# EAGLE board bord_projektpraktikum_v2 (EAGLE 7.7.0)

Size 100 x 80 mm. Coordinates in mm from the lower left corner, seen from the top.
Outline: 0,0 100,0 100,80 0,80 0,0
Copper layers (1*16): Top 0.035mm / dielectric 1.5mm / Bottom 0.035mm
Design rules "default": minimum track width 10mil, minimum drill 24mil, track to track 8mil, track to pad 8mil, pad to pad 8mil, via to via 8mil, smd to smd 8mil, copper to edge 40mil, drill to drill 8mil, minimum pad ring 10mil, minimum via ring 8mil, stop-mask expansion 4mil, vias tented up to drill 0mil, thermal gap 10mil

## Footprints (pad centres in the part's own frame; a part is rotated, then mirrored left to right if it is on the bottom)
TO220H = drill 1.118 long: 1 -2.54,-10.16; 2 0,-10.16; 3 2.54,-10.16 | hole 3.302: 0,4.826
SOT54E = drill 0.813 octagon: D -1.27,0; G 0,1.905; S 1.27,0
E2,5-6E = drill 0.813 pad 1.575: + -1.27,0 | drill 0.813 pad 1.575 octagon: - 1.27,0
C025-025X050 = drill 0.813 octagon: 1 -1.27,0; 2 1.27,0
LED5MM = drill 0.813 octagon: A -1.27,0; K 1.27,0
1X18 = drill 1.016 pad 1.88: 1 0,0; 2 2.54,0; 3 5.08,0; 4 7.62,0; 5 10.16,0; 6 12.7,0; 7 15.24,0; 8 17.78,0; 9 20.32,0; 10 22.86,0; 11 25.4,0; 12 27.94,0; 13 30.48,0; 14 33.02,0; 15 35.56,0; 16 38.1,0; 17 40.64,0; 18 43.18,0
DIL16 = drill 0.813 long: 1 -8.89,-3.81; 2 -6.35,-3.81; 3 -3.81,-3.81; 4 -1.27,-3.81; 5 1.27,-3.81; 6 3.81,-3.81; 7 6.35,-3.81; 8 8.89,-3.81; 9 8.89,3.81; 10 6.35,3.81; 11 3.81,3.81; 12 1.27,3.81; 13 -1.27,3.81; 14 -3.81,3.81; 15 -6.35,3.81; 16 -8.89,3.81
1X16 = drill 1.016 pad 1.88: 1 0,0; 2 2.54,0; 3 5.08,0; 4 7.62,0; 5 10.16,0; 6 12.7,0; 7 15.24,0; 8 17.78,0; 9 20.32,0; 10 22.86,0; 11 25.4,0; 12 27.94,0; 13 30.48,0; 14 33.02,0; 15 35.56,0; 16 38.1,0
DCJ0303 = drill 1 pad 2 long: 1 0,3.1; 2 4.8,0; 3 0,-3
0204/5 = drill 0.813 octagon: 1 -2.54,0; 2 2.54,0
RTRIM4G/J = smd 1.3 x 1.3: 1 -1.15,-2.75; 3 1.15,-2.75 | smd 2 x 1.3: 2 0,2.75
PN87520 = drill 0.95 long: 1 -3.5,2.71; 2 -1,2.71; 3 1,2.71; 4 3.5,2.71 | hole 2.3: -6.57,0; 6.57,0
EINTASTER = drill 0.8 square: 13 0,1.905; 14 0,-1.905
T36 = drill 1: 0 -15.24,-5.08; 1 -12.7,-5.08; 2 -10.16,-5.08; 3 -7.62,-5.08; 3V3(1) 17.78,-5.08; 3V3(2) 27.94,0; 3V3(3) -12.7,10.16; 3V3(4) 40.64,5.08; 4 -5.08,-5.08; 5 -2.54,-5.08; 5V -11.43,-1.905; 6 0,-5.08; 7 2.54,-5.08; 8 5.08,-5.08; 9 7.62,-5.08; 10 10.16,-5.08; 11 12.7,-5.08; 12 15.24,-5.08; 13 15.24,10.16; 14 12.7,10.16; 15 10.16,10.16; 16 7.62,10.16; 17 5.08,10.16; 18 2.54,10.16; 19 0,10.16; 20 -2.54,10.16; 21 -5.08,10.16; 22 -7.62,10.16; 23 -10.16,10.16; 24 20.32,-5.08; 25 22.86,-5.08; 26 25.4,-5.08; 27 27.94,-5.08; 28 30.48,-5.08; 29 33.02,-5.08; 30 35.56,-5.08; 31 38.1,-5.08; 32 40.64,-5.08; 33 40.64,10.16; 34 38.1,10.16; 35 35.56,10.16; 36 33.02,10.16; 37 30.48,10.16; 38 27.94,10.16; 39 25.4,10.16; 40 20.32,2.54; 41 22.86,2.54; 42 25.4,2.54; 43 30.48,2.54; 44 33.02,2.54; 45 35.56,2.54; 46 38.1,2.54; 47 38.1,5.08; 48 35.56,5.08; 49 33.02,5.08; 50 30.48,5.08; 51 25.4,5.08; 52 22.86,5.08; 53 20.32,5.08; 54 5.08,5.08; 55 2.54,5.08; 56 0,5.08; 57 -2.54,5.08; A10 -7.62,7.62; A11 -5.08,7.62; AGND -15.24,10.16; AREF -10.16,7.62; D+ -6.35,-1.905; D- -8.89,-1.905; DAC0 22.86,10.16; DAC1 20.32,10.16; DC 2.54,2.54; DD 5.08,2.54; DE 0,2.54; G1 27.94,2.54; G2 17.78,10.16; G3 40.64,2.54; G4 -3.81,-1.905; G5 -1.27,-1.905; G6 -2.54,2.54; P 27.94,5.08; R 27.94,7.62; VBAT 27.94,-2.54; VIN -17.78,10.16; VUSB -15.24,7.62 | drill 1 square: G0 -17.78,-5.08

## Placement (x,y rotation side)
5V->3.3V  TSR 1-2433  [TO220H]  -162.56,11.43 0 top  (outside the outline)
24V->5V  TSR 1-2450  [TO220H]  -139.7,11.43 0 top  (outside the outline)
.  [SOT54E]  -50.8,143.51 0 top  (outside the outline)
..  [SOT54E]  -43.18,143.51 0 top  (outside the outline)
..2  [SOT54E]  -35.56,143.51 0 top  (outside the outline)
..3  [SOT54E]  -165.1,-73.66 0 top  (outside the outline)
C1  [E2,5-6E]  -100.33,69.85 0 top  (outside the outline)
C2  [E2,5-6E]  -27.94,87.63 0 top  (outside the outline)
C3  [E2,5-6E]  -57.15,87.63 0 top  (outside the outline)
C4  [C025-025X050]  -165.1,-58.42 0 top  (outside the outline)
DEB_LÄUFT  [LED5MM]  -44.45,99.06 0 top  (outside the outline)
DISPLAY  [1X18]  53.34,2.54 0 top
IC3  [DIL16]  -157.48,-40.64 0 top  (outside the outline)
J2  [1X16]  -53.34,149.86 0 top  (outside the outline)
J4  24V  [DCJ0303]  -50.8,76.2 0 top  (outside the outline)
MES_LAEUFT  [LED5MM]  -27.94,99.06 0 top  (outside the outline)
Q1  BS170  [SOT54E]  -21.59,132.08 0 top  (outside the outline)
Q2  BS170  [SOT54E]  -33.02,132.08 0 top  (outside the outline)
Q3  BS170  [SOT54E]  -44.45,132.08 0 top  (outside the outline)
Q4  BS170  [SOT54E]  -55.88,132.08 0 top  (outside the outline)
Q5  BS170  [SOT54E]  -67.31,132.08 0 top  (outside the outline)
Q6  BS170  [SOT54E]  -78.74,132.08 0 top  (outside the outline)
Q7  BS170  [SOT54E]  -90.17,132.08 0 top  (outside the outline)
Q8  BS170  [SOT54E]  -101.6,132.08 0 top  (outside the outline)
Q9  BS170  [SOT54E]  -113.03,132.08 0 top  (outside the outline)
Q10  BS170  [SOT54E]  -21.59,138.43 0 top  (outside the outline)
Q11  BS170  [SOT54E]  -33.02,138.43 0 top  (outside the outline)
Q12  BS170  [SOT54E]  -44.45,138.43 0 top  (outside the outline)
Q13  BS170  [SOT54E]  -55.88,138.43 0 top  (outside the outline)
Q14  BS170  [SOT54E]  -67.31,138.43 0 top  (outside the outline)
Q15  BS170  [SOT54E]  -78.74,138.43 0 top  (outside the outline)
Q16  BS170  [SOT54E]  52.07,68.58 0 top
Q17  BS170  [SOT54E]  -101.6,138.43 0 top  (outside the outline)
Q18  BS170  [SOT54E]  -113.03,138.43 0 top  (outside the outline)
R1  [0204/5]  -57.15,97.79 0 top  (outside the outline)
R2  200  [0204/5]  -119.38,138.43 0 top  (outside the outline)
R3  [0204/5]  -74.93,97.79 0 top  (outside the outline)
R4  200  [0204/5]  -16.51,144.78 0 top  (outside the outline)
R5  [0204/5]  -92.71,97.79 0 top  (outside the outline)
R6  [0204/5]  -110.49,97.79 0 top  (outside the outline)
R7  [0204/5]  -21.59,105.41 0 top  (outside the outline)
R8  [0204/5]  -39.37,105.41 0 top  (outside the outline)
R9  [0204/5]  -57.15,105.41 0 top  (outside the outline)
R10  [0204/5]  -74.93,105.41 0 top  (outside the outline)
R11  [0204/5]  -92.71,105.41 0 top  (outside the outline)
R12  [0204/5]  -110.49,105.41 0 top  (outside the outline)
R13  [0204/5]  -21.59,111.76 0 top  (outside the outline)
R14  [0204/5]  -39.37,111.76 0 top  (outside the outline)
R15  [0204/5]  -57.15,111.76 0 top  (outside the outline)
R16  [0204/5]  -74.93,111.76 0 top  (outside the outline)
R17  [0204/5]  -92.71,111.76 0 top  (outside the outline)
R18  [0204/5]  -110.49,111.76 0 top  (outside the outline)
R20  10K  [0204/5]  -21.59,118.11 0 top  (outside the outline)
R21  10K  [0204/5]  -39.37,118.11 0 top  (outside the outline)
R22  10K  [0204/5]  -57.15,118.11 0 top  (outside the outline)
R23  10K  [0204/5]  -74.93,118.11 0 top  (outside the outline)
R24  10K  [0204/5]  -92.71,118.11 0 top  (outside the outline)
R25  10K  [0204/5]  -110.49,118.11 0 top  (outside the outline)
R26  10K  [0204/5]  -21.59,124.46 0 top  (outside the outline)
R27  10K  [0204/5]  -39.37,124.46 0 top  (outside the outline)
R28  10K  [0204/5]  -57.15,124.46 0 top  (outside the outline)
R29  10K  [0204/5]  -74.93,124.46 0 top  (outside the outline)
R30  10K  [0204/5]  -92.71,124.46 0 top  (outside the outline)
R31  10K  [0204/5]  -110.49,124.46 0 top  (outside the outline)
R32  [RTRIM4G/J]  41.91,3.81 0 top
SERIAL1/USB  [PN87520]  8.89,2.54 0 top
SERIAL2/USB  [PN87520]  25.4,2.54 0 top
STARTE_DEB  [EINTASTER]  -107.95,85.09 0 top  (outside the outline)
STARTE_MES  [EINTASTER]  -121.92,85.09 0 top  (outside the outline)
U$1  TEENSY3_6--ALLPINS  [T36]  -82.55,11.43 0 top  (outside the outline)

## Library data of the parts
5V->3.3V 24V->5V = linear
. .. ..2 ..3 Q1-Q18 = transistor-small-signal
C1-C4 R1-R18 R20-R32 = resistor
DEB_LÄUFT MES_LAEUFT = led
DISPLAY = SPARKFUN-CONNECTOR
IC3 = ic-package
J2 = SparkFun-Connectors
J4 = con-jack; OC_FARNELL: unknown; OC_NEWARK: unknown
SERIAL1/USB SERIAL2/USB = con-berg; OC_FARNELL: unknown; OC_NEWARK: unknown
STARTE_DEB STARTE_MES = e-schalter
U$1 = Teensy_3_6

## Nets
.: ..D R26.1 SERIAL1/USB.2
GND: 5V->3.3V.2 24V->5V.2 C1.- C2.- C3.- C4.1 DISPLAY.1 IC3.1 IC3.2 IC3.3 IC3.8 J4.3 R1.1 R2.2 R3.1 R4.2 R5.1 R6.1 R7.1 R8.1 R9.1 R10.1 R11.1 R12.1 R13.1 R14.1 R15.1 R16.1 R17.1 R18.1 R32.3 SERIAL1/USB.3 SERIAL2/USB.3 U$1.G0 U$1.G1 U$1.G2 U$1.G3 U$1.G4 U$1.G5 U$1.G6
N$1: ...S R25.1 U$1.1
N$2: ..2.S R28.1 U$1.8
N$3: ..3.D R30.1 SERIAL2/USB.2
N$5: ..2.D R31.1 SERIAL2/USB.1
N$8: STARTE_MES.14 U$1.38
N$9: J2.16 Q1.D R1.2
N$10: DISPLAY.14 IC3.4
N$12: 24V->5V.1 J4.1 Q1.S Q2.S Q3.S Q4.S Q5.S Q6.S Q7.S Q8.S Q9.S Q11.S Q13.S Q14.S Q15.S Q16.S Q17.S Q18.S
N$13: Q1.G U$1.21
N$14: J2.14 Q3.D R5.2
N$15: MES_LAEUFT.A R2.1
N$16: MES_LAEUFT.K U$1.40
N$17: DEB_LÄUFT.A R4.1
N$18: DEB_LÄUFT.K U$1.39
N$19: STARTE_DEB.13 U$1.37
N$20: Q2.G U$1.22
N$21: J2.13 Q4.D R6.2
N$22: J2.12 Q5.D R3.2
N$23: Q4.G U$1.24
N$24: Q5.G U$1.25
N$25: DISPLAY.3 R32.2
N$26: J2.8 Q9.D R11.2
N$27: J2.9 Q8.D R10.2
N$28: J2.7 Q11.D R12.2
N$29: Q8.G U$1.28
N$30: Q9.G U$1.29
N$31: Q11.G U$1.30
N$32: J2.1 Q17.D R18.2
N$33: J2.6 Q13.D R13.2
N$34: DISPLAY.11 IC3.7
N$35: Q3.G U$1.23
N$36: J2.15 Q2.D R8.2
N$37: J2.11 Q6.D R7.2
N$38: J2.10 Q7.D R9.2
N$39: Q6.G U$1.26
N$40: Q7.G U$1.27
N$41: J2.5 Q14.D R14.2
N$42: J2.4 Q15.D R15.2
N$43: J2.3 Q16.D R16.2
N$44: J2.2 Q18.D R17.2
N$45: Q13.G U$1.31
N$46: Q14.G U$1.32
N$47: Q15.G U$1.33
N$48: Q16.G U$1.34
N$49: Q18.G U$1.35
N$50: Q17.G U$1.36
N$52: 5V->3.3V.3 ..2.G ..3.G ...G ..G Q10.G Q12.G R20.2 R22.2 R24.2 R25.2 R28.2 R29.2
N$53: DISPLAY.13 IC3.5
N$54: IC3.14 Q10.D R21.2
N$55: IC3.15 Q12.D R23.2
N$57: Q12.S R22.1 U$1.48
N$58: DISPLAY.12 IC3.6
N$59: DISPLAY.6 IC3.9
N$60: DISPLAY.5 IC3.10
N$62: DISPLAY.4 IC3.11
N$63: ...D R27.1 SERIAL1/USB.1
N$64: ..3.S R29.1 U$1.7
N$65: Q10.S R20.1 U$1.47
N$66: 5V->3.3V.1 24V->5V.3 C4.2 DISPLAY.15 IC3.16 R21.1 R23.1 R26.2 R27.2 R30.2 R31.2 R32.1 STARTE_DEB.14 STARTE_MES.13
N$67: ..S R24.1 U$1.0
N$68: C3.+ DISPLAY.18 U$1.2
N$69: C2.+ DISPLAY.17 U$1.3
N$70: C1.+ DISPLAY.16 U$1.4

## Tracks (layer width: path | path; a pad name or v marks a point on that pad's centre or on a via)
.  (2 unrouted)
GND  (39 unrouted)
N$1  (2 unrouted)
N$2  (2 unrouted)
N$3  (2 unrouted)
N$5  (2 unrouted)
N$8  (1 unrouted)
N$9  (2 unrouted)
N$10  (1 unrouted)
N$12  (17 unrouted)
N$13  (1 unrouted)
N$14  (2 unrouted)
N$15  (1 unrouted)
N$16  (1 unrouted)
N$17  (1 unrouted)
N$18  (1 unrouted)
N$19  (1 unrouted)
N$20  (1 unrouted)
N$21  (2 unrouted)
N$22  (2 unrouted)
N$23  (1 unrouted)
N$24  (1 unrouted)
N$25  (1 unrouted)
N$26  (2 unrouted)
N$27  (2 unrouted)
N$28  (2 unrouted)
N$29  (1 unrouted)
N$30  (1 unrouted)
N$31  (1 unrouted)
N$32  (2 unrouted)
N$33  (2 unrouted)
N$34  (1 unrouted)
N$35  (1 unrouted)
N$36  (2 unrouted)
N$37  (2 unrouted)
N$38  (2 unrouted)
N$39  (1 unrouted)
N$40  (1 unrouted)
N$41  (2 unrouted)
N$42  (2 unrouted)
N$43  (2 unrouted)
N$44  (2 unrouted)
N$45  (1 unrouted)
N$46  (1 unrouted)
N$47  (1 unrouted)
N$48  (1 unrouted)
N$49  (1 unrouted)
N$50  (1 unrouted)
N$52  (12 unrouted)
N$53  (1 unrouted)
N$54  (2 unrouted)
N$55  (2 unrouted)
N$57  (2 unrouted)
N$58  (1 unrouted)
N$59  (1 unrouted)
N$60  (1 unrouted)
N$62  (1 unrouted)
N$63  (2 unrouted)
N$64  (2 unrouted)
N$65  (2 unrouted)
N$66  (13 unrouted)
N$67  (2 unrouted)
N$68  (2 unrouted)
N$69  (2 unrouted)
N$70  (2 unrouted)